# Altium PCB main_board.PcbDoc (part 1 of 2)
Units mm, origin at the board's own origin, x right, y up, seen from the top; angles counter-clockwise.
Board outline 50 x 49.98 mm, 2 copper layers (Top Layer, Bottom Layer), stack 1.071 mm thick; 96 components, 82 nets, 418 pads, 272 vias.
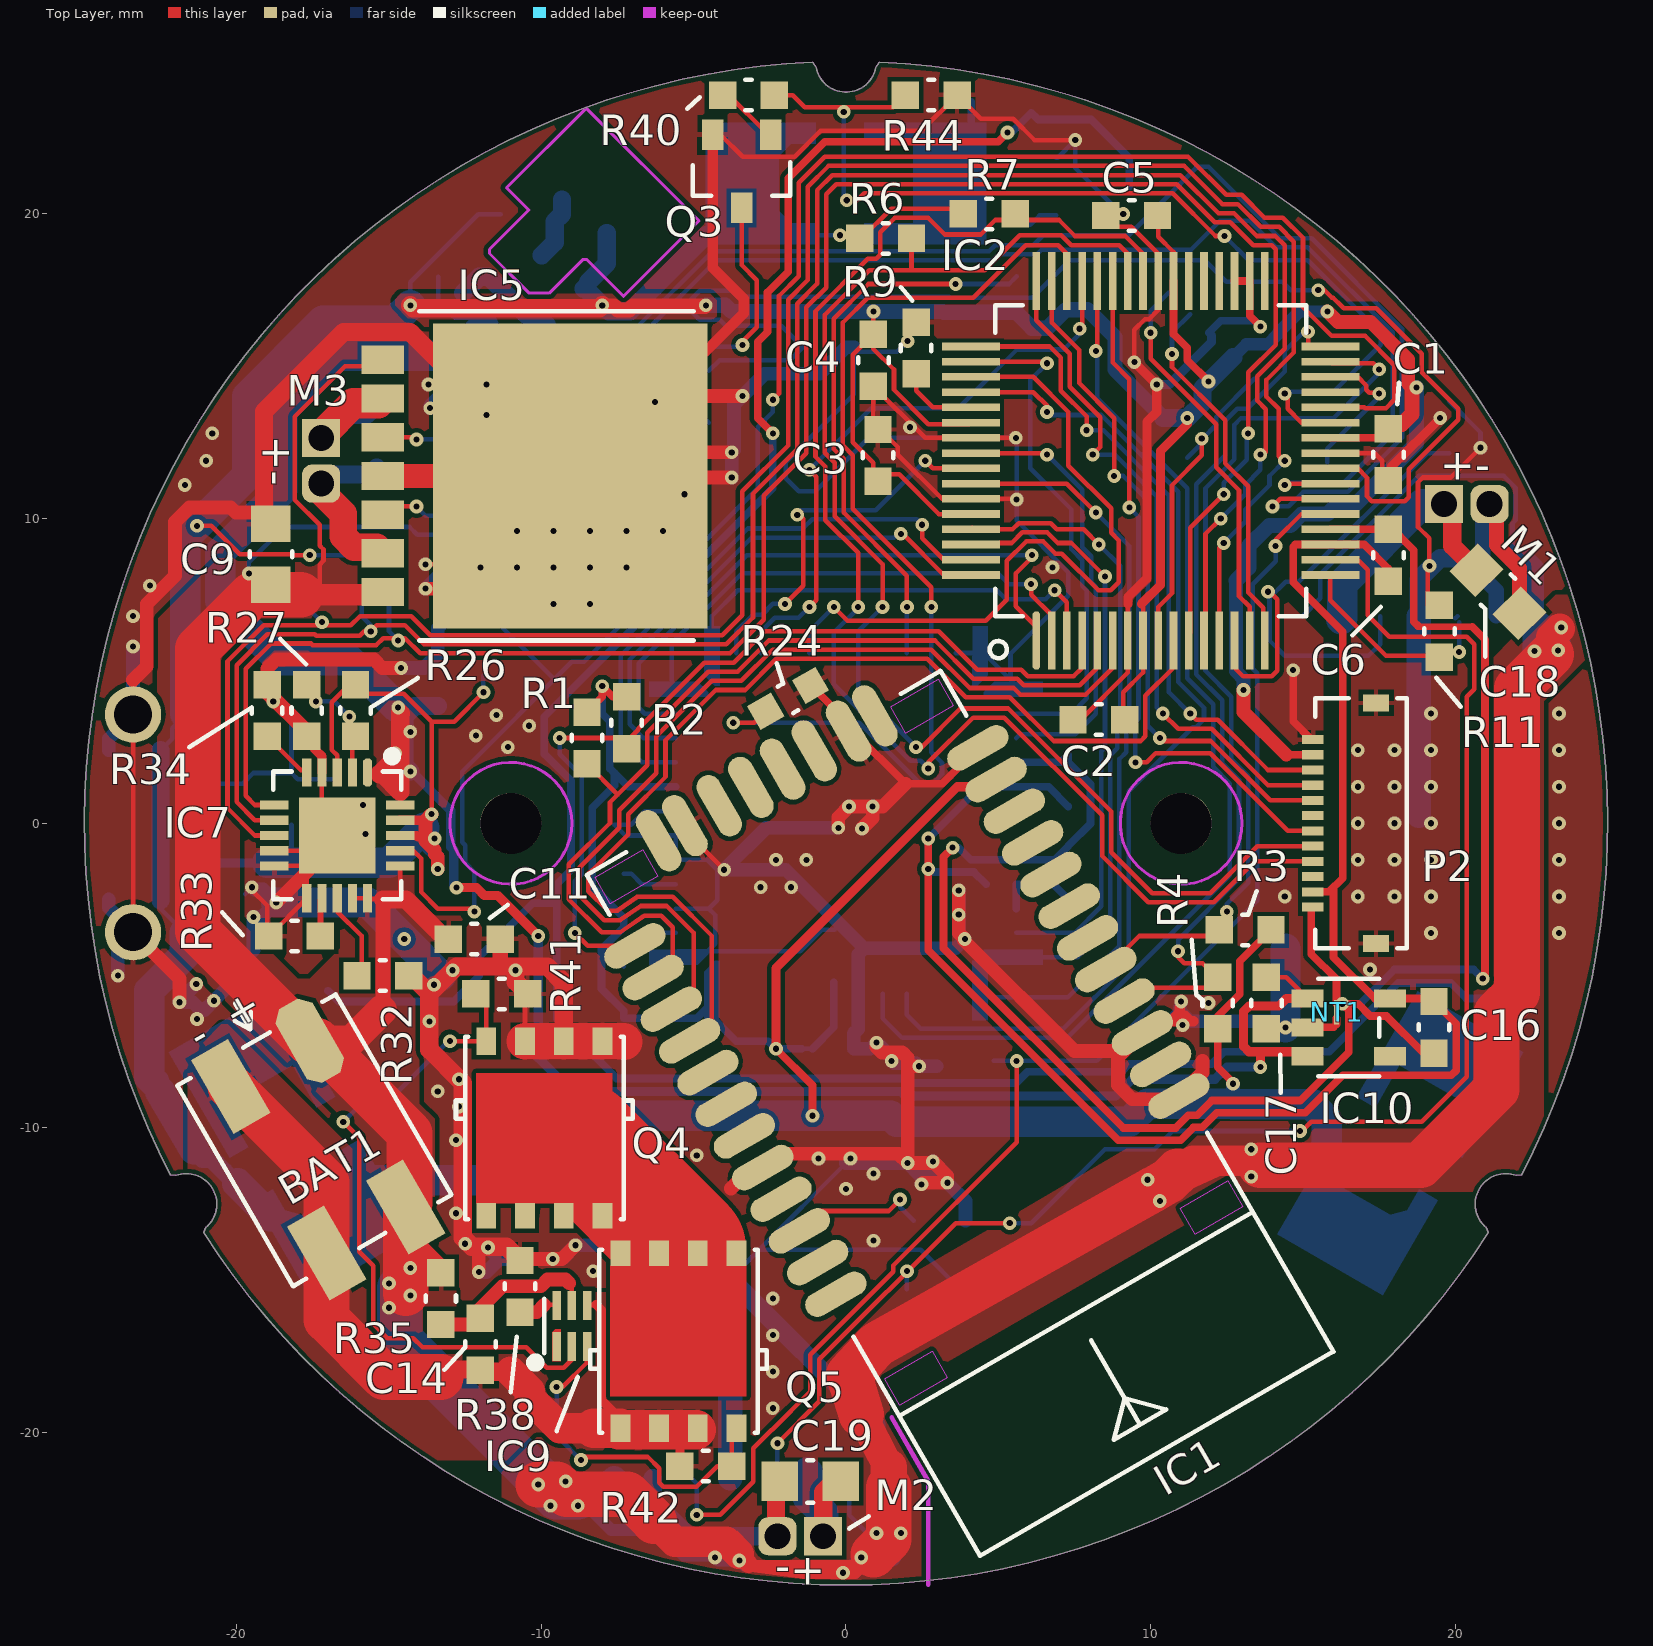
[diagram p0: Top Layer view]
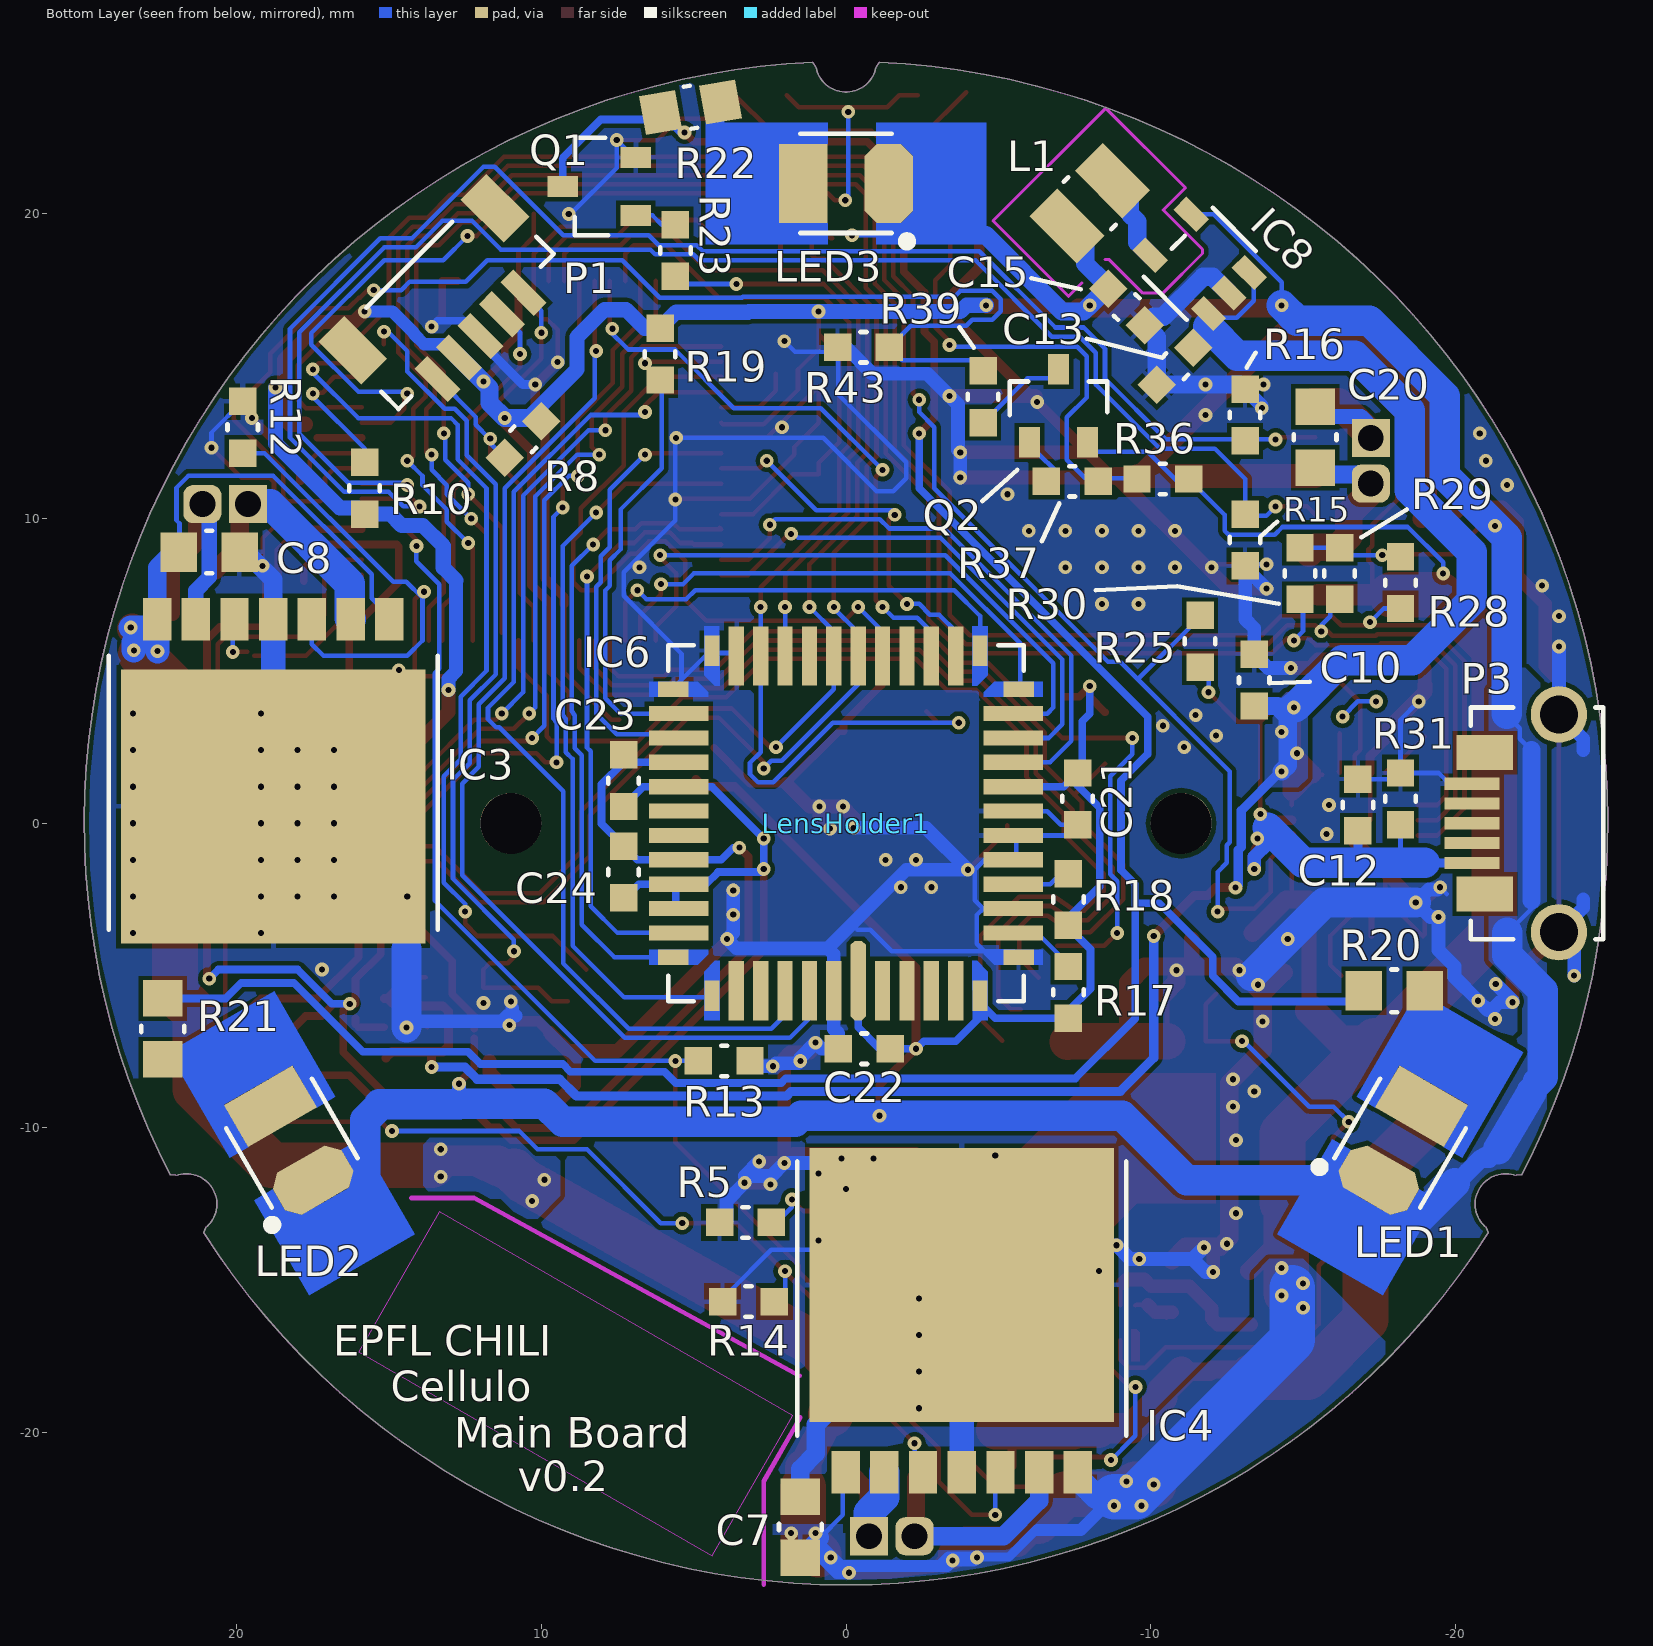
[diagram p1: Bottom Layer view, seen from below]

## Layer stack, top to bottom
Top Layer: signal copper 0.0356
Dielectric: core 1, FR-4, Dk 4.8
Bottom Layer: signal copper 0.0356

## Board outline
-21.085,-13.432 -21.008,-13.266 ccw(c-21.651,-12.5) -21.993,-11.56 -22.175,-11.544 cw(c0,0) -1.09,24.976 -0.985,24.826 ccw(c0,25) 0.985,24.826 1.09,24.976 cw(c0,0) 22.175,-11.544 21.993,-11.56 ccw(c21.651,-12.5) 21.008,-13.266 21.085,-13.432 cw(c0,0)

## Design rules (kind name [scope] priority, off if disabled: settings)
Clearance [All] p1: gap=0.15
ComponentClearance "NT1 clearance" [InComponent('NT1')] p1: gap=0 collisioncheckmode=3 verticalgap=0 showdistances=FALSE
ComponentClearance [All] p2: gap=0.15 collisioncheckmode=3 verticalgap=0.254 showdistances=FALSE
Height [All] p1: minheight=0 maxheight=999 prefheight=1
HoleSize [All] p1: absolutevalues=TRUE maxlimit=999 minlimit=0.2 maxpercent=80.000 minpercent=20.000
HoleToHoleClearance [All] p1: gap=0.45 allowstackedmicrovias=TRUE
MinimumSolderMaskSliver [All] p1: minsoldermaskwidth=0.1
PlaneClearance [All] p1: clearance=0.15
PlaneConnect [All] p1: planeconnectstyle=Relief reliefexpansion=0.45 reliefentries=4 reliefconductorwidth=0.15 reliefairgap=0.15
PolygonConnect ViaConnect [All vs IsVia] p1: connectstyle=Direct reliefconductorwidth=0.15 reliefentries=4 polygonreliefangle="90 Angle" airgapwidth=0.15
PolygonConnect [All] p2: connectstyle=Relief reliefconductorwidth=0.15 reliefentries=4 polygonreliefangle="90 Angle" airgapwidth=0.15
RoutingVias [All] p1: holewidth=0.3 width=0.45 viastyle="Through Hole" minholewidth=0.3 minwidth=0.45 maxholewidth=999 maxwidth=999
ShortCircuit NC1_ALLOW [InComponent('IC9')] p1: allowed=TRUE
ShortCircuit [All] p2: allowed=FALSE
SilkToSilkClearance [All] p1: silktosilkclearance=0
SilkToSolderMaskClearance [IsPad] p1: minsilkscreentomaskgap=0.15 clearancetoexposedcopper=TRUE
SolderMaskExpansion [All] p1: expansion=0.102
Width [All] p1: maxlimit=999 minlimit=0.15 preferedwidth=0.15 minimp=50.000000 maximp=50.000000 favimp=50.000000
18 further rules are at their usual default settings.

## Classes and differential pairs
component class Communication: IC1 R1 R2 R3 R4 R5
component class Microcontroller: C1 C2 C3 C4 C5 C6 IC2 P1 P2 R6 R7 R8 R9 R10
component class Motor: C7 C8 C9 C18 C19 C20 IC3 IC4 IC5 M1 M2 M3 R11 R12 R13 R14 R15 R16
component class Optics: C21 C22 C23 C24 IC6 LED1 LED2 LED3 Q1 R17 R18 R19 R20 R21 R22 R23 R24
component class Power: BAT1 C10 C11 C12 C13 C14 C15 C16 C17 IC7 IC8 IC9 IC10 L1 NT1 P3 Q2 Q3 Q4 Q5 R25 R26 R27 R28 R29 R30 R31 R32 R33 R34 R35 R36 R37 R38 R39 R40 R41 R42 R43 R44
net class PIXEL_D[0..7]: PIXEL_D0 PIXEL_D1 PIXEL_D2 PIXEL_D3 PIXEL_D4 PIXEL_D5 PIXEL_D6 PIXEL_D7

## Components (designator, comment, footprint, x,y, rotation, side; value= is the part's Value field where it differs from the comment)
BAT1 "Battery_1S" "WAGO 2059-302" -17.45,-10.404 r300 top
C1 "0.1uF" 1608[0603]_M 17.8,12.1 r90 top
C2 "0.1uF" 1608[0603]_M 8.3,3.4 r0 top
C3 "0.1uF" 1608[0603]_M 1.05,12.075 r270 top
C4 "0.1uF" 1608[0603]_M 0.9,15.2 r90 top
C5 "0.1uF" 1608[0603]_M 9.375,19.95 r0 top
C6 "0.1uF" 1608[0603]_M 17.8,8.8 r270 top
C7 "47uF" 2012[0805]_M 1.5,-23.1 r270 bottom
C8 "47uF" 2012[0805]_M 20.9,8.9 r0 bottom
C9 "47uF" 2012[0805]_M -18.875,8.825 r270 top
C10 "4.7uF, 10V" 1608[0603]_M -13.4,4.7 r270 bottom
C11 "4.7uF, 10V" 1608[0603]_M -12.2,-3.8 r180 top
C12 "10uF, 10V" 1608[0603]_M -16.8,0.6 r270 bottom
C13 "4.7uF, 10V" 1608[0603]_M -10.8,15 r135 bottom
C14 "0.1uF, 10V" 1608[0603]_M -12,-17.1 r90 top
C15 "10uF, 10V" 1608[0603]_M -9.21,16.944 r45 bottom
C16 "4.7uF, 10V" 1608[0603]_M 19.3,-6.7 r90 top
C17 "4.7uF, 10V" 1608[0603]_M 13.8,-5.9 r90 top
C18 "Unpopulated" 2012[0805]_M 21.4,7.6 r135 top
C19 "Unpopulated" 2012[0805]_M -1.175,-21.6 r0 top
C20 "Unpopulated" 2012[0805]_M -15.4,12.67 r90 bottom
C21 "0.1uF" 1608[0603]_M -7.6,0.8 r90 bottom
C22 "0.1uF" 1608[0603]_M -0.6,-7.4 r180 bottom
C23 "0.1uF" 1608[0603]_M 7.3,1.4 r270 bottom
C24 "0.1uF" 1608[0603]_M 7.3,-1.6 r270 bottom
IC1 "RN42-I/RM" RN42 3.748,-9.522 r210 top
IC2 "PIC32MZ1024ECG064-I/PT" TQFP-64_M 10,11.9 r90 top
IC3 "BD6210HFP" HRP7_N 18.8,0.8 r0 bottom
IC4 "BD6210HFP" HRP7_N -3.8,-15.4 r180 bottom
IC5 "BD6210HFP" HRP7_N -9.3,11.4 r270 top
IC6 "MT9V034C12STM" CLCC-48_m 0,0 r0 bottom
IC7 "MCP73871-2CCI/ML" QFN-20_M -16.7,-0.4 r90 top
IC8 "LM3671MF-3.3" SOT23-5_N -11.614,18.359 r45 bottom
IC9 "BQ29700DSET" WSON-6_M -9,-16.5 r0 top
IC10 "LP2980-AIM5-3.3" SOT23-5_N 16.5,-6.7 r0 top
L1 "SRN2512-2R2M" 2520[1008]_N -8,20.35 r315 bottom
LED1 "Unpopulated" PLCC2_WITH_HEATSINK -18.19,-10.5 r300 bottom
LED2 "Unpopulated" PLCC2_WITH_HEATSINK 18.19,-10.5 r240 bottom
LED3 "Unpopulated" PLCC2_WITH_HEATSINK 0,21 r180 bottom
LensHolder1 "Unpopulated" BoardLensMount_M12_22mm 0,0 r180 bottom
M1 "Unpopulated" CABLE-TERMINAL1x2 20.375,10.475 r0 top
M2 "Unpopulated" CABLE-TERMINAL1x2 -1.5,-23.4 r180 top
M3 "Unpopulated" CABLE-TERMINAL1x2 -17.225,11.9 r270 top
NT1 "NET-TIE" NET-TIE-0.15MM 16.1,-6.2 r90 top net-tie
P1 "Connector 5" BM05B-SRSS_N 13.255,17.255 r135 bottom
P2 "Connector 12" FH33-12S-0.5SH_N 16,0 r90 top
P3 "MicroUSB2.0" USB3076_M -23.375,0 r90 bottom
Q1 "BSS138BK" SOT23-3_N 8.1,20.9 r0 bottom
Q2 "Unpopulated" SOT23-3_N -6.975,13.7 r90 bottom
Q3 "Unpopulated" SOT23-3_N -3.425,21.4 r270 top
Q4 "CSD17527Q5A" PG-TDSON-8_MOSFET_M -9.9,-10 r90 top
Q5 "CSD17527Q5A" PG-TDSON-8_MOSFET_M -5.5,-17 r270 top
R1 "10K" 1608[0603]_M -8.5,2.8 r90 top
R2 "10K" 1608[0603]_M -7.2,3.3 r90 top
R3 "10K" 1608[0603]_M 13.1,-3.5 r0 top
R4 "10K" 1608[0603]_M 12.2,-5.9 r270 top
R5 "10K" 1608[0603]_M 3.3,-13.1 r180 bottom
R6 "1K5" 1608[0603]_M 1.3,19.2 r180 top
R7 "1K5" 1608[0603]_M 4.7,20 r180 top
R8 "10K" 1608[0603]_M 10.6,12.6 r135 bottom
R9 "Unpopulated" 1608[0603]_M 2.3,15.6 r270 top
R10 "10K" 1608[0603]_M 15.8,11 r270 bottom
R11 "10K" 1608[0603]_M 19.475,6.3 r270 top
R12 "10K" 1608[0603]_M 19.8,13 r270 bottom
R13 "10K" 1608[0603]_M 4,-7.8 r0 bottom
R14 "10K" 1608[0603]_M 3.2,-15.7 r180 bottom
R15 "10K" 1608[0603]_M -13.1,9.3 r90 bottom
R16 "10K" 1608[0603]_M -13.1,13.4 r270 bottom
R17 "1K" 1608[0603]_M -7.3,-5.55 r270 bottom
R18 "1K" 1608[0603]_M -7.3,-2.5 r270 bottom
R19 "10K" 1608[0603]_M 6.1,15.4 r90 bottom
R20 "26R1, 0.1%, 1/8W" 2012[0805]_M -18,-5.5 r180 bottom
R21 "26R1, 0.1%, 1/8W" 2012[0805]_M 22.425,-6.75 r270 bottom
R22 "26R1, 0.1%, 1/8W" 2012[0805]_M 5.1,23.5 r170 bottom
R23 "330" 1608[0603]_M 5.6,18.8 r90 bottom
R24 "10K" 1608[0603]_M -1.9,4.1 r210 top
R25 "100K" 1608[0603]_M -11.625,5.975 r270 bottom
R26 "270K" 1608[0603]_M -16.1,3.7 r90 top
R27 "100K" 1608[0603]_M -17.7,3.7 r90 top
R28 "10K" 1608[0603]_M -18.2,7.9 r90 bottom
R29 "10K" 1608[0603]_M -16.2,8.2 r90 bottom
R30 "10K" 1608[0603]_M -14.9,8.2 r90 bottom
R31 "100K" 1608[0603]_M -18.2,0.8 r270 bottom
R32 "1K69" 1608[0603]_M -15.2,-5 r180 top
R33 "16K9" 1608[0603]_M -18.1,-3.7 r0 top
R34 "10K" 1608[0603]_M -19,3.7 r270 top
R35 "330" 1608[0603]_M -13.3,-15.6 r90 top
R36 "Unpopulated" 1608[0603]_M -10.4,11.3 r180 bottom
R37 "Unpopulated" 1608[0603]_M -7.425,11.225 r180 bottom
R38 "2K2" 1608[0603]_M -10.7,-15.2 r270 top
R39 "Unpopulated" 1608[0603]_M -4.5,14 r270 bottom
R40 "Unpopulated" 1608[0603]_M -3.2,23.9 r0 top
R41 "5M1" 1608[0603]_M -11.3,-5.6 r180 top
R42 "5M1" 1608[0603]_M -4.6,-21.1 r0 top
R43 "10K" 1608[0603]_M -0.575,15.625 r180 bottom
R44 "Unpopulated" 1608[0603]_M 2.8,23.9 r180 top

## Footprints (in the part's own frame and the unit in brackets; to place one, negate y for a bottom-side part, rotate by r counter-clockwise, add the part's x,y. Pads: shape width x height; smd on the part's side, far side on the other; paste and mask are expansions set on the pad)
1608[0603]_M [mm] "Two Terminal Package, Body 1.6x0.8mm, IPC Low Density"
  rect 0.9x0.9 smd: 1(-0.85,0) 2(0.85,0)
  silkscreen extent -0.1,-0.5 0.1,0.5, body extent -0.8,-0.4 0.8,0.4, height 0.85
2012[0805]_M [mm] "Two Terminal Package, Body 2x1.2mm, IPC Low Density"
  rect 1.2x1.3 smd: 1(-1,0) 2(1,0)
  silkscreen extent -0.1,-0.7 0.1,0.7, body extent -1,-0.6 1,0.6, height 1.3
2520[1008]_N [mm] "Two Terminal Package, Body 2.5x2mm, IPC Medium Density"
  rect 1.3x2.2 smd: 1(-1.05,0) 2(1.05,0)
  silkscreen extent -0.1,-1.1 0.1,1.1, body extent -1.25,-1 1.25,1, height 1.2
BM05B-SRSS_N [mm] "SH Connector, 5-Leads, 1mm Pitch, Top Entry, IPC Medium Density"
  rect 0.6x1.55 smd: 1(-2,-1.775) 2(-1,-1.775) 3(0,-1.775) 4(1,-1.775) 5(2,-1.775)
  rect 1.2x2 smd: Mechanical1(-3.3,0.85) Mechanical2(3.3,0.85)
  silkscreen extent -3.6,-1.58 3.6,1.53, body extent -3.5,-1.45 3.5,1.45, height 4.25
BoardLensMount_M12_22mm [mm] "M12 (S-Mount) board lens mount base, 22mm hole distance, 16mm height"
  round 2 hole 2 unplated: 0(-11,0) 1(11,0)
  body extent -13.25,-10.5 13.25,10.5, height 16
CABLE-TERMINAL1x2 [mm] "Cable to board terminal, 1x2, 1.5mm pitch"
  rect 1.25x1.25 hole 0.85 mask+0.075: 1(-0.75,0)
  rrect50% 1.25x1.25 hole 0.85 mask+0.075: 2(0.75,0)
CLCC-48_m [mm] "CLCC, 48-Leads, Body 11.43x11.43x2.3mm, Pitch 0.8mm, IPC Low Density"
  oct 0.5x2.6 smd paste-0.025 mask+0.075: 1(-0.4,5.165)
  rect 0.5x1.95 smd paste-0.025 mask+0.075: 2(-1.2,5.49) 3(-2,5.49) 4(-2.8,5.49) 5(-3.6,5.49) 20(-3.6,-5.49) 21(-2.8,-5.49) 22(-2,-5.49) 23(-1.2,-5.49) 24(-0.4,-5.49) 25(0.4,-5.49) 26(1.2,-5.49) 27(2,-5.49) 28(2.8,-5.49) 29(3.6,-5.49) 44(3.6,5.49) 45(2.8,5.49) 46(2,5.49) 47(1.2,5.49) 48(0.4,5.49)
  rect 0.5x1 smd paste-0.025 mask+0.075: 6(-4.4,5.665) 19(-4.4,-5.665) 30(4.4,-5.665) 43(4.4,5.665)
  rect 1x0.5 smd paste-0.025 mask+0.075: 7(-5.665,4.4) 18(-5.665,-4.4) 31(5.665,-4.4) 42(5.665,4.4)
  rect 1.95x0.5 smd paste-0.025 mask+0.075: 8(-5.49,3.6) 9(-5.49,2.8) 10(-5.49,2) 11(-5.49,1.2) 12(-5.49,0.4) 13(-5.49,-0.4) 14(-5.49,-1.2) 15(-5.49,-2) 16(-5.49,-2.8) 17(-5.49,-3.6) 32(5.49,-3.6) 33(5.49,-2.8) 34(5.49,-2) 35(5.49,-1.2) 36(5.49,-0.4) 37(5.49,0.4) 38(5.49,1.2) 39(5.49,2) 40(5.49,2.8) 41(5.49,3.6)
  Top Layer region: -6.465,4.15 -4.515,4.15 -4.515,4.3 -4.865,4.65 -6.465,4.65
  Top Layer region: -4.155,6.465 -4.15,4.515 -4.3,4.515 -4.65,4.865 -4.65,6.465
  Top Layer region: -6.465,-4.155 -4.515,-4.15 -4.515,-4.3 -4.865,-4.65 -6.465,-4.65
  Top Layer region: -4.15,-6.465 -4.15,-4.515 -4.3,-4.515 -4.65,-4.865 -4.65,-6.465
  Top Layer region: 4.155,-6.465 4.15,-4.515 4.3,-4.515 4.65,-4.865 4.65,-6.465
  Top Layer region: 6.465,-4.15 4.515,-4.15 4.515,-4.3 4.865,-4.65 6.465,-4.65
  Top Layer region: 6.465,4.155 4.515,4.15 4.515,4.3 4.865,4.65 6.465,4.65
  Top Layer region: 4.15,6.465 4.15,4.515 4.3,4.515 4.65,4.865 4.65,6.465
  silkscreen extent -5.84,-5.84 5.84,5.84, body extent -5.71,-5.71 5.71,5.71, height 2.3
FH33-12S-0.5SH_N [mm] "Flax flexible cable connector, 12-Leads, 0.5mm Pitch, Side entry, IPC medium density"
  rect 0.3x0.7 smd paste-0.025 mask+0.049: 1(-2.75,0.675) 2(-2.25,0.675) 3(-1.75,0.675) 4(-1.25,0.675) 5(-0.75,0.675) 6(-0.25,0.675) 7(0.25,0.675) 8(0.75,0.675) 9(1.25,0.675) 10(1.75,0.675) 11(2.25,0.675) 12(2.75,0.675)
  rect 0.55x0.85 smd: Mechanical1(-3.95,-1.4) Mechanical2(3.95,-1.4)
  silkscreen extent -4.1,-2.4 4.1,0.6, body extent -4.08,-2.35 4.07,0.5, height 1.3
HRP7_N [mm] "HRP, 7-Leads, 1.27mm Pitch, Body 9x9.8mm, Lead Span 10.7mm, IPC Medium Density"
  rect 0.93x1.4 smd: 1(-3.81,-5.9) 2(-2.54,-5.9) 3(-1.27,-5.9) 4(0,-5.9) 5(1.27,-5.9) 6(2.54,-5.9) 7(3.81,-5.9)
  rect 10x9 smd: Heatsink(0,0.25)
  silkscreen extent -5.4,-4.7 5.4,4.3, body extent -4.88,-4.7 4.88,4.3, height 2
NET-TIE-0.15MM [mm] "Net tie, 0.15mm track width"
  rect 0.4x0.15 smd paste-0.075 mask+0: 1(-0.2,0) 2(0.2,0)
PG-TDSON-8_MOSFET_M [mm] "PG-TDSON, MOSFET terminals, 8-Leads, Body 5x5.8mm, Pitch 1.27mm, IPC Low Density"
  rect 0.83x0.65 smd: D(-2.885,-1.905) D(-2.885,-0.635) D(-2.885,0.635) D(-2.885,1.905)
  rect 0.9x0.65 smd: G(2.85,1.905) S(2.85,-1.905) S(2.85,-0.635) S(2.85,0.635)
  Top Layer region: 1.798,2.23 -2.472,2.23 -2.472,-2.23 1.798,-2.23
  silkscreen extent -3,-2.9 3,2.9, body extent -2.9,-2.5 2.9,2.5, height 1.1
PLCC2_WITH_HEATSINK [mm] "PLCC, 2-Leads, Body 3x2.8mm, Lead Span 3.5mm, with heatsink pad extensions"
  oct 1.6x2.6 smd: 1(1.4,0)
  rect 1.6x2.6 smd: 2(-1.4,0)
  Top Layer region: 4.6,2 4.6,-2 1,-2 1,-1.3 1.8,-1.3 2.2,-0.9 2.2,0.9 1.8,1.3 1,1.3 1,2
  Top Layer region: -4.6,-2 -4.6,2 -0.6,2 -0.6,1.3 -2.2,1.3 -2.2,-1.3 -0.6,-1.3 -0.6,-2
  silkscreen extent -1.5,-2.05 2.15,1.62, body extent -1.6,-1.4 1.6,1.4, height 1.85
QFN-20_M [mm] "QFN, 20-Leads, Body 4x4mm, Pitch 0.5mm, IPC Low Density"
  oct 0.93x0.3 smd paste-0.025 mask+0.05: 1(2.065,-1)
  rect 0.93x0.3 smd paste-0.025 mask+0.05: 2(2.065,-0.5) 3(2.065,0) 4(2.065,0.5) 5(2.065,1) 11(-2.065,1) 12(-2.065,0.5) 13(-2.065,0) 14(-2.065,-0.5) 15(-2.065,-1)
  rect 0.3x0.93 smd paste-0.025 mask+0.05: 6(1,2.065) 7(0.5,2.065) 8(0,2.065) 9(-0.5,2.065) 10(-1,2.065) 16(-1,-2.065) 17(-0.5,-2.065) 18(0,-2.065) 19(0.5,-2.065) 20(1,-2.065)
  rect 2.5x2.5 smd mask+0.05: EP(0,0)
  silkscreen extent -2.1,-2.1 2.75,2.1, body extent -2,-2 2,2, height 1
RN42 [mm] "Microchip RN42 Bluetooth Module"
  oval 2.2x0.8 smd: 1(-6.5,3.1) 2(-6.5,1.9) 3(-6.5,0.7) 4(-6.5,-0.5) 5(-6.5,-1.7) 6(-6.5,-2.9) 7(-6.5,-4.1) 8(-6.5,-5.3) 9(-6.5,-6.5) 10(-6.5,-7.7) 11(-6.5,-8.9) 12(-6.5,-10.1) 13(6.5,-10.1) 14(6.5,-8.9) 15(6.5,-7.7) 16(6.5,-6.5) 17(6.5,-5.3) 18(6.5,-4.1) 19(6.5,-2.9) 20(6.5,-1.7) 21(6.5,-0.5) 22(6.5,0.7) 23(6.5,1.9) 24(6.5,3.1)
  oval 0.8x2.2 smd mask+0.05: 28(3.1,-12.7) 29(-3.1,-12.7) 30(4.1,-12.7) 35(-4.1,-12.7)
  oval 0.8x2.2 smd: 31(1.8,-12.7) 32(0.6,-12.7) 33(-0.6,-12.7) 34(-1.8,-12.7)
  Top Layer keep-out region: 4.7,6.3 4.7,7.3 6.5,7.3 6.5,6.3
  Top Layer keep-out region: -6.5,6.3 -6.5,7.3 -4.7,7.3 -4.7,6.3
  Top Layer keep-out region: 4.7,-12.7 4.7,-11.7 6.5,-11.7 6.5,-12.7
  Top Layer keep-out region: -6.5,-12.7 -6.5,-11.7 -4.7,-11.7 -4.7,-12.7
  Keep-Out Layer region: -6.7,12.9 6.7,12.9 6.7,7.6 -6.7,7.6
  silkscreen extent -6.7,-12.9 6.7,12.9, body extent -6.7,-12.9 6.7,12.9, height 2.4
SOT23-3_N [mm] "SOT23, 3-Leads, Body 1.4x3mm, Lead Span 2.6mm, IPC Medium Density"
  rect 1x0.7 smd: 1(-1.2,0.95) 2(-1.2,-0.95) 3(1.2,0)
  silkscreen extent -0.3,-1.6 0.8,1.6, body extent -0.7,-1.5 0.7,1.5, height 1.1
SOT23-5_N [mm] "SOT23, 5-Leads, Body 1.6x3mm, Lead Span 3mm, IPC Medium Density"
  rect 1.05x0.6 smd: 1(-1.35,0.95) 2(-1.35,0) 3(-1.35,-0.95) 4(1.35,-0.95) 5(1.35,0.95)
  silkscreen extent -1,-1.6 1,1.6, body extent -0.9,-1.5 0.9,1.5, height 1.45
TQFP-64_M [mm] "TQFP, 44-Leads, Body 10x10x1.2mm, Pitch 0.5mm, Lead Span 12mm, IPC Low Density"
  oct 1.9x0.25 smd paste-0.025 mask+0.075: 1(-5.9,3.75)
  rect 1.9x0.25 smd paste-0.025 mask+0.075: 2(-5.9,3.25) 3(-5.9,2.75) 4(-5.9,2.25) 5(-5.9,1.75) 6(-5.9,1.25) 7(-5.9,0.75) 8(-5.9,0.25) 9(-5.9,-0.25) 10(-5.9,-0.75) 11(-5.9,-1.25) 12(-5.9,-1.75) 13(-5.9,-2.25) 14(-5.9,-2.75) 15(-5.9,-3.25) 16(-5.9,-3.75) 33(5.9,-3.75) 34(5.9,-3.25) 35(5.9,-2.75) 36(5.9,-2.25) 37(5.9,-1.75) 38(5.9,-1.25) 39(5.9,-0.75) 40(5.9,-0.25) 41(5.9,0.25) 42(5.9,0.75) 43(5.9,1.25) 44(5.9,1.75) 45(5.9,2.25) 46(5.9,2.75) 47(5.9,3.25) 48(5.9,3.75)
  rect 0.25x1.9 smd paste-0.025 mask+0.075: 17(-3.75,-5.9) 18(-3.25,-5.9) 19(-2.75,-5.9) 20(-2.25,-5.9) 21(-1.75,-5.9) 22(-1.25,-5.9) 23(-0.75,-5.9) 24(-0.25,-5.9) 25(0.25,-5.9) 26(0.75,-5.9) 27(1.25,-5.9) 28(1.75,-5.9) 29(2.25,-5.9) 30(2.75,-5.9) 31(3.25,-5.9) 32(3.75,-5.9) 49(3.75,5.9) 50(3.25,5.9) 51(2.75,5.9) 52(2.25,5.9) 53(1.75,5.9) 54(1.25,5.9) 55(0.75,5.9) 56(0.25,5.9) 57(-0.25,5.9) 58(-0.75,5.9) 59(-1.25,5.9) 60(-1.75,5.9) 61(-2.25,5.9) 62(-2.75,5.9) 63(-3.25,5.9) 64(-3.75,5.9)
  silkscreen extent -6.48,-5.1 5.1,5.28, body extent -5,-5 5,5, height 1.2
USB3076_M [mm] "Micro USB B Receptacle, Horizontal, 0.65mm Pitch, IPC Low Density"
  rect 0.4x1.8 smd paste-0.025 mask+0.074: 1(-1.3,2.825) 2(-0.65,2.825) 3(0,2.825) 4(0.65,2.825) 5(1.3,2.825)
  round 1.85 hole 1.25: PegSlot1(-3.575,-0.025) PegSlot2(3.575,-0.025)
  rect 1.15x1.85 smd paste-0.025 mask+0.05: Shield1(-2.32,2.405) Shield2(2.32,2.405)
  silkscreen extent -3.8,-1.48 3.8,2.87, body extent -3.7,-2.77 3.7,2.78, height 2.66
"WAGO 2059-302" [mm] "Wire to Board Terminal, 2-Poles, 3mm Pitch"
  oct 2.8x1.4 smd: 1(-2.9,1.5)
  rect 2.8x1.4 smd: 1(3.4,1.5) 2(-2.9,-1.5) 2(3.4,-1.5)
  silkscreen extent -5.2,-3 3.8,3, body extent -3.7,-2.95 3.7,2.95, height 2.7
WSON-6_M [mm] "WSON, 6-Leads, Body 1.55x1.55mm, Pitch 0.5mm, IPC Low Density"
  rect 0.28x0.95 smd paste-0.025 mask+0.05: 1(-0.5,-0.675) 2(0,-0.675) 3(0.5,-0.675) 4(0.5,0.675) 5(0,0.675) 6(-0.5,0.675)
  Top Layer region: -0.64,-0.2 -0.54,-0.1 -0.36,-0.1 -0.36,-1.15 -0.64,-1.15
  silkscreen extent -1.35,-1.35 0.9,0.9, body extent -0.77,-0.77 0.77,0.77, height 0.8

## Part data
BAT1: "Generic single cell battery"
C1 C2 C3 C4 C5 C6 C7 C8 C9 C10 C11 C12 C13 C14 C15 C16 C17 C18 C19 C20 C21 C22 C23 C24: library part Capacitor, "Generic Capacitor"
IC1: library part RN42, "Bluetooth 2.1 module"
IC2: library part PIC32MZ1024ECG064, "32-bit Microcontroller"
IC3 IC4 IC5: library part BD621xHFP, "DC Motor driver, full H-bridge"
IC6: "1/3\" WVGA CMOS Image Sensor"
IC7: "Li-Po battery charge controller with system load sharing"
IC8: library part LM3671, "2MHz, 600mA step-down converter"
IC9: library part BQ29700, "Li-Po battery voltage and current protection"
IC10: library part LP2980-N, "50 mA, ultra low drop-out voltage regulator"
L1: library part Inductor, "Inductor"
LED1 LED2 LED3: library part LED, "Generic LED"
M1 M2 M3: library part DCMotor, "Generic DC motor"
NT1: "Generic net tie"
P1: "Connector 5-Pin"
P2: "Connector 12-Pin"
P3: "Micro USB 2.0 plug/receptacle, 5-Leads"
Q1 Q3 Q4 Q5: library part MOSFET-N_BodyDiode, "N-channel MOSFET with body diode drawn"
Q2: library part MOSFET-P_BodyDiode, "P-channel MOSFET with body diode drawn"
R1 R2 R3 R4 R5 R6 R7 R8 R9 R10 R11 R12 R13 R14 R15 R16 R17 R18 R19 R20 R21 R22 R23 R24 R25 R26 R27 R28 R29 R30 R31 R32 R33 R34 R35 R36 R37 R38 R39 R40 R41 R42 R43 R44: library part Resistor, "Generic Resistor"

## Via types
v1: diameter 0.45, hole 0.2, Top Layer to Bottom Layer, 271 vias
v2: diameter 0.45, hole 0.2, Top Layer to Bottom Layer, tented both sides, 1 vias

## Nets (pads, with @x,y where several pads share a name; then routed paths per layer and width w, separated by ;. In a path a pad name is that pad's centre, name@x,y a point inside that pad or via, vN(x,y) a via of type N, cw(c..) or ccw(c..) an arc to the next point about the centre after c; other vN are vias at no path point)
3V3: C1.2 C2.2 C3.2 C4.2 C5.2 C15.2 C21.2 C22.2 IC1.11 IC2.8 IC2.26 IC2.39 IC2.54 IC2.60 IC6.1 IC6.6 IC6.14 IC8.4 L1.2 LED1.1 LED2.1 LED3.1 P1.2 P2.11 R1.2 R2.2 R3.2 R4.2 R6.2 R7.2 R8.2 R10.2 R17.2 R18.2 R19.2 R28.2 R29.2 R30.2 | length 239
  Top Layer w0.15: v1(-21.3,9.764) -20.839,9.764 -19.9,8.825 -18.157,8.825 -18.132,8.8 v1(-17.6,8.8) ; R6.2@0.45,19.2 0.508,19.2 1.483,20.175 3.675,20.175 R7.2@3.85,20 ; v1(0.9,16.8) C4.2@0.9,16.05 ; IC2.60@4.1,10.15 3.05,10.15 1.75,11.45 0.9,11.45 0.9,11.833 0.225,12.508 0.225,15.375 C4.2@0.9,16.05 ; IC2.54@4.1,13.15 4.05,13.1 2.7,13.1 1.575,14.225 1.575,14.893 0.9,15.568 C4.2@0.9,16.05 ; C2.2@9.15,3.4 9.1,3.45 9.1,4.3 9.75,4.95 9.75,7.15 9.7,7.2 ; C5.2@10.25,20 10.25,19.25 10.75,18.75 IC2.39@10.75,17.8
  Top Layer w0.25: R1.2@-8.5,3.65 -8,4.15 v1(-8,4.5) -7.65,4.15 R2.2@-7.2,4.15 ; v1(-8,17) v1@-7.974,16.974 ; v1(-2.3,-7.4) -1.1,-8.6 v1(-1.1,-9.6) ; IC2.39@10.75,17.8 10.75,16.057 11.2,15.607 11.2,15.2 v1(11.9,14.5) ; R4.2@12.2,-7.05 12.2,-8 12.7,-8.5 v1(12.7,-8.55) ; R4.2@12.2,-6.75 12.2,-6.339 12.925,-5.614 12.925,-4.525 R3.2@13.95,-3.5 ; 14.45,2.25 P2.11@15.275,2.25 ; IC2.26@15.9,12.65 C1.2@17.35,12.65
  Top Layer w0.3: v1(-2.3,-7.4) -2.3,-4.758 3.658,1.2 4.691,1.2 IC1.11@4.927,1.436 ; 9.7,7.2 10.325,7.825 10.325,12.225 11.2,13.1 v1(11.2,13.3)
  Top Layer w0.45: v1(13.05,4.375) 13.05,3.65 14.45,2.25 ; v1(15.8,16.8) 16.15,16.45 17.223,16.45 18.45,15.223 18.45,14.425 v1@18.525,14.35
  Top Layer w0.5: v1@-7.974,16.974 -7.613,16.974 -7.488,16.849 -7.115,16.849 -6.99,16.974 v1@-4.626,16.974 ; C1.2@17.75,13.1 18.247,13.1 18.575,13.428 v1@18.575,14.2
  Top Layer w0.6: v1(-14.3,17) -14.2,16.9 -8.1,16.9 v1(-8,17)
  Bottom Layer w0.15: -22.5,-2.525 -22.5,-2.8 -21.7,-3.6 ; -22.5,2.4 -22.12,2.78 -22.12,3.12 -21.692,3.548 -21.692,3.592 ; v1(-17.6,8.8) -16.45,8.8 R29.2@-16.2,9.05 R30.2@-15,9.05 ; v1(-14.3,17) -14.3,17.759 -12.074,19.985 IC8.4@-11.331,19.985 ; IC6.6@-4.565,-5.55 IC6.6@-4.4,-5.715 ; -1.5,19.3 v1(-0.2,19.3) ; C22.2@-1.45,-7.4 C22.2@-1.1,-7.4
  Bottom Layer w0.25: v1(-8,4.5) -8,3.6 -7.75,3.35 -7.75,1.8 C21.2@-7.6,1.65 ; IC6.14@-5.59,1.2 -7.15,1.2 C21.2@-7.6,1.65 ; IC6.6@-4.4,-5.715 IC6.6@-4.4,-5.9 ; -1.5,-9.6 -1.45,-9.55 ; C22.2@-1.45,-7.4 v1(-2.3,-7.4) -2.55,-7.15 -3.604,-7.15 -4.4,-6.354 IC6.6@-4.4,-5.9 ; C22.2@-1.1,-7.4 -0.4,-6.7 IC6.1@-0.4,-5.215 ; C21.2@-7.6,1.65 -7.6,1.239 -8.325,0.514 -8.325,-2.075 -7.3,-3.1 R18.2@-7.3,-3.35 -7.3,-3.411 -8.025,-4.136 -8.025,-5.425 -7.3,-6.15 R17.2@-7.3,-6.4 -4.9,-6.4 IC6.6@-4.4,-5.9
  Bottom Layer w0.4: P1.2@12.707,15.293 13.139,15.725 13.362,15.725 13.845,15.725 14.182,16.062 14.182,16.095 14.887,16.8 v1(15.8,16.8)
  Bottom Layer w0.45: 12.7,-9.2 v1(12.7,-8.55) ; 12.8,7.972 12.8,4.989 13.05,4.739 v1(13.05,4.375)
  Bottom Layer w0.5: v1(-4.6,17) -3.953,17 -3.753,16.8 v1(0.9,16.8) 3.192,16.8 3.217,16.775 5.575,16.775 R19.2@6.1,16.25 6.616,16.25 7.223,16.857 7.926,16.857 8.825,15.959 8.825,14.891 R8.2@10.416,13.3 ; 12.8,7.972 13.216,8.388 13.216,9.1 13.891,9.775 14.583,9.775 14.958,10.15 R10.2@15.8,10.15 16,10.35 16.614,10.35 18.725,12.461 v1(18.725,14.3)
  Bottom Layer w0.6: -22.5,-2.525 -22.5,2.4 ; -21.4,-10.7 -20.828,-11.011 ; -21.111,-11.011 -20.828,-11.011 ; -19.981,-11.819 -20.019,-11.819 -20.408,-11.43 -20.828,-11.011 ; C15.2@-8.609,17.545 -8.545,17.545 v1(-8,17) -7.799,16.799 -7.094,16.799 -4.593,19.3 -4.2,19.3 -3.4,20.1 ; C15.2@-8.468,17.758 -7.85,18.375 L1.2@-7.85,19.375 ; R8.2@10.416,13.3 v1(11.2,13.3) 11.7,13.8 11.7,14.286 P1.2@12.707,15.293
  Bottom Layer w0.8: -22.7,-8.5 -22.7,-8.629 -22.514,-8.814
  Bottom Layer w1: -22.7,-8.5 -22.872,-8.328 -22.872,-5.497 -21.7,-4.325 -21.7,-3.6 ; -22.514,-8.814 -21.4,-10.7 ; -21.692,3.592 -21.692,9.371 v1(-21.3,9.764) -19.65,11.414 -19.65,14.021 -17.171,16.5 -14.8,16.5 v1(-14.3,17) ; -19.981,-11.819 -18.9,-12.9 ; LED1.1@-17.49,-11.712 -11.182,-11.712 -9.069,-9.6 -1.5,-9.6 1.469,-9.6 1.669,-9.8 9.3,-9.8 9.9,-9.2 12.7,-9.2 ; 12.7,-9.225 15.325,-9.225 15.325,-9.288 15.775,-9.738 15.775,-11.8
A3V3: C6.2 C16.2 C23.2 C24.2 IC2.19 IC6.35 IC6.39 IC6.40 IC10.5 P2.2 | length 61.3
  Top Layer w0.25: v1(2.7,-0.5) 2.7,-4.166 8.934,-10.4 10.985,-10.4 11.406,-9.978 11.692,-9.978 12.17,-9.5 15.08,-9.5 16.305,-8.275 19.864,-8.275 20.025,-8.114 20.025,-6.575 C16.2@19.3,-5.85 19.2,-5.75 IC10.5@17.85,-5.75 17.35,-5.75 16,-4.4 16,-2.1 ; P2.2@15.275,-2.25 15.85,-2.25 16.3,-1.8 16.3,6.286 14.675,7.911 14.675,9.075 14.75,9.15 IC2.19@15.9,9.15 17.011,9.15 17.8,8.361 C6.2@17.8,7.95
  Bottom Layer w0.25: IC6.39@4.6,-2 4.2,-1.6 2.8,-1.6 v1(2.7,-1.5) v1(2.7,-0.5) 4.4,1.2 6.65,1.2 C23.2@7.3,0.55 ; IC6.40@5.59,-2.8 5.59,-2 6.8,-2 C24.2@7.25,-2.45
AGND: C6.1 C16.1 C23.1 C24.1 IC2.20 IC6.34 IC6.38 NT1.2 P2.1 | length 63.3
  Top Layer w0.2: 18.775,6.45 20.55,6.45
  Top Layer w0.25: v1(3.5,-0.8) 3.2,-1.1 3.2,-4.1 9.1,-10 10.819,-10 11.241,-9.578 11.526,-9.578 12.004,-9.1 14.914,-9.1 16.5,-7.514 16.5,-6.136 v1(16.289,-5.925) ; P2.1@15.275,-2.75 15.275,-4.3 16.1,-5.125 16.1,-5.925 v1(16.289,-5.925) ; IC2.20@15.9,9.65 17.6,9.65 17.775,9.825 18.637,8.963 18.637,6.613 18.775,6.475 ; C16.1@19.3,-7.55 18.964,-7.55 17.739,-6.325 17.211,-6.325 16.811,-5.925 v1(16.289,-5.925) ; 20.55,6.45 20.975,6.025 20.975,-5.025 v1(20.9,-5.1)
  Bottom Layer w0.25: v1(3.5,-0.8) 3.7,-0.8 4.1,-1.2 6.85,-1.2 C24.1@7.3,-0.75 7.3,-0.739 8.025,-0.014 8.025,1.275 7.3,2 C23.1@7.3,2.25 7.05,2 IC6.34@5.59,2 ; v1(16.289,-5.925) 16.875,-5.925 18,-4.8 20.6,-4.8 v1(20.9,-5.1)
GND: C1.1 C2.1 C3.1 C4.1 C5.1 C7.1 C8.1 C9.1 C10.1 C11.1 C12.1 C13.1 C15.1 C17.1 C21.1 C22.1 IC1.1 IC1.3 IC1.12 IC1.20 IC1.28 IC1.29 IC2.7 IC2.25 IC2.34 IC2.35 IC2.40 IC2.55 IC2.59 IC3.4 IC3.Heatsink IC4.4 IC4.Heatsink IC5.4 IC5.Heatsink IC6.7 IC6.9 IC6.11 IC6.12 IC6.13 IC6.29 IC6.30 IC6.31 IC6.48 IC7.4 IC7.9 IC7.10 IC7.11 IC7.EP IC8.2 IC10.2 NT1.1 P1.3 P2.12 P2.Mechanical1 P2.Mechanical2 P3.5 P3.PegSlot1 P3.PegSlot2 Q1.2 Q3.2 Q4.S R5.1 R9.1 R11.1 R12.1 R13.1 R14.1 R15.1 R16.1 R24.1 R27.1 R31.1 R32.1 R33.1 R34.1 R38.1 R41.1 R43.1 R44.1 | length 420.8
  Top Layer w0.15: P3.PegSlot1@-23.4,-3.575 P3.PegSlot2@-23.4,3.575 -23.4,4.7 ; v1@-19.5,-2.2 -19,-2.7 -19,-3.65 R33.1@-18.95,-3.7 -18.935,-3.7 IC7.11@-17.7,-2.465 -17.7,-1.6 -17.7,-1.4 IC7.10@-18.765,-1.4 ; IC7.9@-18.765,-0.9 IC7.EP@-17.2,-0.9 ; R27.1@-17.7,2.85 -17.7,3.016 R27.1@-17.7,3.25 ; IC7.EP@-17.2,0.1 IC7.4@-17.2,1.665 ; v1(-13.8,8.5) IC5.Heatsink@-11.75,8.5 ; IC5.Heatsink@-12.389,14.2 IC5.Heatsink@-11.65,14.2 ; R41.1@-10.535,-5.685 Q4.S@-10.535,-7.15 Q4.S@-7.995,-7.15 ; IC1.28@-5.287,-0.073 -5.287,-0.238 v1(-4,-1.525) ; Q3.2@-4.118,22.6 -3.393,21.875 -1.688,21.875 -0.838,22.725 2.475,22.725 R44.1@3.65,23.9 4.425,23.125 5.486,23.125 6.186,22.425 v1(7.525,22.425) ; v1(5.575,12.65) IC2.55@4.1,12.65 2.6,12.65 C4.1@0.9,14.35 0.9,13.15 1.7,12.35 1.7,12.1 3.15,10.65 IC2.59@4.1,10.65 5.575,10.65 v1(5.6,10.625) ; C2.1@7.45,3.4 7.7,3.4 9.25,4.95 9.25,7.2 ; C5.1@8.975,19.575 9.368,19.575 10.25,18.693 IC2.40@10.25,17.8 10.25,16.85 9.95,16.55 9.814,16.55 9.464,16.2 v1(9.464,15.136) ; C17.1@13.7,-6.65 C17.1@13.75,-6.7 ; IC2.25@15.9,12.15 17.35,12.15 17.6,11.9 C1.1@17.6,11.25 ; R11.1@19.1,7.15 19.1,8.5 v1(19.15,8.45) 19.15,9.35 18.775,9.725 18.775,11.193 18.932,11.35 19.85,11.35 v1(20.825,12.325)
  Top Layer w0.25: R24.1@-1.164,4.525 0.082,3.279 IC1.29@0.082,3.027 0.228,3.027 1.954,1.3 3.152,1.3 IC1.12@4.327,2.475 ; IC2.35@12.75,17.8 IC2.34@13.25,17.8 13.25,16.657 13.607,16.3 v1(13.6,16.3) ; v1(14.675,5.025) 14.675,3.35 P2.12@15.275,2.75 ; IC10.2@15.15,-6.7 16,-6.7 16.1,-6.6 NT1.1@16.1,-6.4
  Top Layer w0.3: R27.1@-17.7,2.85 -17.7,2.704 -17.25,2.254 -17.25,2.25 -17.2,2.2 IC7.4@-17.2,1.665 ; 9.25,7.2 9.25,7.417 9.875,8.042 9.875,13.175 10.2,13.5 v1(10.2,14.4) v1(9.464,15.136) ; C1.1@17.9,11.25 17.9,11.7 v1(19.5,13.3)
  Top Layer w0.35: IC5.Heatsink@-8.85,11.4 -8.687,11.4 -7.912,12.175 -6.062,14.025 -3.351,16.735 -3.351,17.212 -4.375,18.235 Q3.2@-4.375,22.6 ; IC1.3@9.727,-6.878 10.105,-6.5 11.399,-6.5 11.3,-6.5 11.12,-6.32 10.843,-6.32 10.953,-6.21 10.953,-6.071
  Top Layer w0.45: P3.PegSlot1@-23.4,-3.575 -21.875,-5.1 v1(-21.875,-5.875) ; -23.4,4.7 -22.95,5.15 -22.95,7.2 -22.025,8.125 -22.025,9.887 -21.549,10.364 -20.196,10.364 -20.032,10.2 C9.1@-19.1,10.2 ; R34.1@-19,4.55 -19,5.075 -18.7,5.375 -15.495,5.375 -15.22,5.1 v1(-14.6,5.1) ; v1(-18.7,-2.6) -17.7,-1.6 -16.7,-0.6 IC7.EP@-16.7,-0.4 ; v1(-13.8,7.7) -12.55,7.7 -11.75,8.5 IC5.Heatsink@-8.85,11.4 ; v1(-12.05,-14.725) -12.05,-14.2 ; R38.1@-10.65,-14.3 v1(-9.625,-14.3) -9.325,-14.3 v1(-8.875,-13.85) ; IC5.Heatsink@-8.8,11.35 v1(-3.75,11.35) ; IC5.Heatsink@-8.075,12.175 -7.912,12.175 v1(-3.75,12.175) ; IC5.Heatsink@-6.225,14.025 -6.062,14.025 v1(-3.4,14.025) ; -3.773,-11.987 -3.157,-11.371 -2.803,-11.371 IC1.20@-2.732,-11.299 -2.282,-10.85 1.725,-10.85 v1(2.025,-11.15) ; v1(-0.25,-0.15) -0.25,0.2 v1(0.1,0.55) v1(0.875,0.55) ; v1(0.525,-0.175) 0.875,0.175 v1(0.875,0.55) ; v1(1,-7.2) 1,-7.35 1.175,-7.525 1.85,-7.525 2.025,-7.7 v1(2.025,-11.15) ; 1.954,1.3 1.204,0.55 v1(0.875,0.55) ; 2.05,-7.975 v1(2.4,-7.975) ; v1(2.475,-11.85) 2.525,-11.8 v1(3.325,-11.8) 3.325,-11.575 v1(2.85,-11.1) 2.8,-11.15 v1(2.025,-11.15) ; v1(3.7,-2.2) v1(3.7,-3) 3.7,-3.6 v1(3.9,-3.8) ; v1@3.863,-3.838 7.5,-7.475 IC1.3@9.13,-7.475 ; IC1.3@9.14,-7.465 IC1.3@9.13,-7.475 ; IC1.3@9.727,-6.878 IC1.3@9.13,-7.475 ; 11.7,-7.8 11.7,-8.183 IC1.1@10.927,-8.956 10.823,-9.06 9.392,-9.06 8.927,-8.596 8.927,-7.677 IC1.3@9.13,-7.475
  Top Layer w0.5: R34.1@-19,4.55 -19,4.316 R27.1@-17.7,3.016 ; -11.35,-4.65 C11.1@-11.35,-3.8
  Top Layer w0.6: C9.1@-18.9,10 -19.1,10.2 -19.1,13.511 -16.486,16.125 -14.314,16.125 -12.389,14.2 -9.589,11.4 IC5.Heatsink@-8.85,11.4 ; R32.1@-14.364,-4.9 -13.675,-5.589 ; v1(-10.85,-4.825) -10.85,-5.2 R41.1@-10.45,-5.6 ; R38.1@-10.7,-14.35 -11.15,-13.9 -12.28,-13.9 -12.58,-13.6 -12.58,-8.525 -13.675,-7.43 -13.675,-5.589 ; Q4.S@-9.265,-7.15 -9.265,-5.235 -9.8,-4.7 -12.786,-4.7 -13.675,-5.589
  Top Layer w0.8: IC5.4@-15.4,11.4 IC5.Heatsink@-9.589,11.4
  Top Layer w1.2: Q4.S@-10.535,-7.15 Q4.S@-9.265,-7.15 Q4.S@-7.995,-7.15 -7.293,-7.15 -7.272,-7.172
  Bottom Layer w0.15: P3.5@-20.55,1.3 -19.8,1.3 -19.45,1.65 R31.1@-18.2,1.65 ; -19.72,-2.32 v1(-19.5,-2.1) ; v1(-18.8,4) -18.2,3.4 R31.1@-18.2,1.65 ; C12.1@-16.8,1.45 -18,1.45 R31.1@-18.2,1.65 ; v1(-13.8,8.5) -13.15,8.5 -13.2,8.45 R15.1@-13.2,8.3 ; -13.3,-5.1 -13.3,-5 ; IC6.7@-5.715,-4.4 -5.515,-4.2 -4.537,-4.2 ; IC6.9@-5.59,-2.8 -4.5,-2.8 ; IC6.13@-5.59,0.4 -6.6,0.4 -7.05,-0.05 C21.1@-7.6,-0.05 -7.25,-0.4 -5.59,-0.4 -5.59,-1.2 -4.55,-1.2 -4.225,-1.525 -4.225,-2.525 -4.5,-2.8 ; IC4.Heatsink@-3.8,-14.95 IC4.Heatsink@-2.85,-14 ; -0.372,-3.5 -0.8,-3.5 -1.5,-4.2 -4.537,-4.2 ; IC4.Heatsink@0.25,-10.9 0,-11.15 IC4.Heatsink@-2.85,-14 ; IC6.48@0.25,-5.74 IC6.48@0.4,-5.59 ; v1(2.025,15.825) 1.675,15.475 0.25,15.475 0.25,14.075 -1.975,11.85 -1.975,11.325 -1.55,10.9 -1,10.9 0.75,12.65 v1(5.575,12.65) 5.6,12.625 v1(5.6,10.625) 5.6,9.936 7.3,8.236 7.3,7.464 5.4,5.564 5.4,4.715 ; IC6.29@3.6,5.59 IC6.30@4.275,5.59 ; R14.1@3.85,-15.4 2.45,-14 IC4.Heatsink@-2.85,-14 ; IC6.30@4.4,5.715 5.4,4.715 ; IC6.31@5.715,4.4 5.4,4.715 ; Q1.2@6.9,21.85 6.95,21.85 v1(7.525,22.425) 7.525,21.507 9.032,20 v1(9.1,20) ; R12.1@19.8,13.85 20.825,12.825 v1(20.825,12.325) ; -4.537,-4.2 -4.29,-3.953 -4.29,-3.01 -4.5,-2.8
  Bottom Layer w0.25: P1.3@11.9,16.1 12.3,16.5 13.407,16.5 13.607,16.3 v1(13.6,16.3)
  Bottom Layer w0.3: v1(10.2,14.4) 10.6,14.4 12,15.8 P1.3@12,16
  Bottom Layer w0.45: -24.2,-2.5 -24.2,-2.775 P3.PegSlot1@-23.4,-3.575 -23.9,-4.075 v1(-23.9,-5) ; -24.2,2.4 -24.2,2.775 P3.PegSlot2@-23.4,3.575 v1(-23.4,5.8) ; v1(-21.325,-5.275) -21.875,-5.825 v1(-21.875,-5.875) -21.441,-5.875 -21.175,-6.141 -21.066,-6.141 v1(-20.75,-5.825) -19.975,-5.05 -19.975,-4.695 -19.45,-4.17 v1(-19.45,-3.075) -19.175,-3.075 v1(-18.7,-2.6) -19.125,-2.175 -19.425,-2.175 v1(-19.5,-2.1) ; v1(-14.6,5.1) -13.85,5.1 C10.1@-13.4,5.55 -13.4,6.4 -13.1,6.7 -13.1,8.2 -13.2,8.3 v1(-13.8,7.7) ; v1(-13.65,13.625) -13.65,13.7 R16.1@-13.1,14.25 ; v1(-12.05,-14.725) -11.8,-14.725 -11.375,-14.3 ; v1(-11.75,-13.925) -11.375,-14.3 ; IC4.Heatsink@-4.9,-13.85 v1(-8.875,-13.85) -9.325,-14.3 v1(-9.625,-14.3) -11.375,-14.3 ; v1(-3.75,11.35) v1(-3.75,12.175) -3.675,12.25 -3.675,13.75 v1(-3.4,14.025) -2.675,14.75 -0.87,14.75 0.005,15.625 R43.1@0.275,15.625 ; v1(-0.25,-0.15) -2.625,-0.15 v1(-4,-1.525) -1.975,-1.525 0.6,-4.1 ; IC4.Heatsink@0,-11.15 v1(2.025,-11.15) 2.45,-11.575 3.325,-11.575 v1(2.85,-11.1) ; R13.1@2.975,-7.975 v1(2.4,-7.975) 2.3,-7.875 1.575,-7.875 v1(1.5,-7.8) 1.5,-7.7 v1(1,-7.2) 0.8,-7.4 C22.1@0.25,-7.4 0.25,-6.9 0.4,-6.75 0.4,-5.59 0.4,-4.3 0.6,-4.1 ; v1(3.325,-11.8) 3.925,-12.4 R5.1@3.925,-13.05 ; v1(3.7,-2.2) v1(3.7,-3) 3.7,-3.6 v1(3.9,-3.8) ; v1@3.863,-3.837 3.6,-4.1 0.6,-4.1 ; 10.953,-6.071 10.953,-6.21 10.843,-6.32 11.12,-6.32 11.3,-6.5 11.399,-6.5 14.225,-6.5 v1(14.425,-6.7)
  Bottom Layer w0.6: R16.1@-13.1,14.25 -12.95,14.4 -10.398,14.4 -10.199,14.599 -10.199,15.955 C15.1@-9.811,16.343 ; IC8.2@-12.569,17.404 -12.038,17.934 -11.72,17.934 -10.412,16.626 C15.1@-10.094,16.626 ; IC4.Heatsink@-3.8,-14.95 0.995,-19.745 0.995,-20.687 1.5,-21.191 C7.1@1.5,-22.1 ; IC3.4@18.8,6.8 18.8,8 19.5,8.7 C8.1@19.9,8.7
  Bottom Layer w0.8: IC4.4@-3.8,-21.5 IC4.Heatsink@-3.8,-14.95 ; IC3.Heatsink@18.8,0.25 IC3.4@18.8,6.8
  Bottom Layer w1: v1(-18.7,-2.6) -15.7,-2.6 v1(-14.5,-3.8) -13.3,-5 ; v1(14.425,-6.7) 14.425,-4.125
  other v1: -2.4,-19.2 -2.4,-18 -2.4,-16.8 -2.4,-15.6 -8.3,-14.7 -12.5,-13.8 0.9,-13.7 -12.8,-12.8 0,-12 0.9,-11.5 -0.9,-11 0.15,-11 -4.9,-10.9 -12.8,-10.4 -12.7,-9.3 -13.4,-8.8 -12.705,-8.4 11.05,-6.625 -13.675,-6.5 -21.3,-6.425 11.9,-5.9 11,-5.85 -13.525,-5.3 -12.911,-4.825 17.2,-4.8 19.2,-3.6 23.4,-3.6 14.4,-2.4 16.8,-2.4 18,-2.4 19.2,-2.4 23.4,-2.4 -2.8,-2.1 -1.8,-2.1 -2.3,-1.2 -1.3,-1.2 16.8,-1.2 18,-1.2 19.2,-1.2 23.4,-1.2 -15.775,-0.35 16.8,0 18,0 19.2,0 23.4,0 -15.85,0.6 16.8,1.2 18,1.2 19.2,1.2 23.4,1.2 16.8,2.4 18,2.4 19.2,2.4 23.4,2.4 -11.1,2.5 -12.15,2.875 -10.4,3.2 -11.475,3.55 19.2,3.6 23.4,3.6 -23.4,6.8 -9.6,7.2 -8.4,7.2 -22.85,7.8 -12,8.4 -10.8,8.4 -9.6,8.4 -8.4,8.4 -7.2,8.4 6.775,8.4 -10.8,9.6 -9.6,9.6 -8.4,9.6 -7.2,9.6 -6,9.6 -5.3,10.8 -21.7,11.1 -21,11.9 -20.8,12.8 2.1,13 -11.8,13.4 -6.275,13.825 -13.7,14.4 -11.8,14.4
IMG_CLK: IC2.44 IC6.47 | length 35.9
  Top Layer w0.15: v1@8.25,15.5 IC2.44@8.25,17.8
  Bottom Layer w0.15: IC6.47@1.2,-5.59 1.2,-6.4 1.84,-7.04 7.26,-7.04 12.6,-1.7 12.6,1.3 12.05,1.85 12.05,3.911 11.2,4.761 11.2,11 8.25,13.95 v1@8.25,15.45
  other v1: 8.2,15.5
IMG_EXPOSURE: IC2.51 IC6.23 | length 23.9
  Top Layer w0.15: v1(-0.4,7.1) 0.05,6.65 4.586,6.65 5.275,7.339 5.275,8.611 5.914,9.25 6.474,9.25 6.874,8.85 7.086,8.85 8.286,7.65 8.686,7.65 8.95,7.914 8.95,9.282 8.7,9.532 8.7,10.336 7.3,11.736 7.3,13.5 6.15,14.65 IC2.51@4.1,14.65
  Bottom Layer w0.15: IC6.23@-1.2,5.59 -1.2,6.3 v1(-0.4,7.1)
LED_SCLK: IC2.49 P2.10 | length 21.6
  Top Layer w0.15: IC2.49@4.1,15.65 6.686,15.65 7.05,15.286 7.05,14.201 7.9,13.351 v1(7.9,12.9) ; v1(11.3,3.6) 11.5,3.4 12.2,3.4 13.85,1.75 P2.10@15.275,1.75
  Bottom Layer w0.15: v1(7.9,12.9) 8.451,12.9 10.6,10.751 10.6,4.3 v1(11.3,3.6)
LED_SIN: IC2.47 P2.8 | length 22.5
  Top Layer w0.15: IC2.47@6.75,17.8 6.75,16.435 7.65,15.535 7.65,14.45 8.8,13.3 v1(8.8,11.4) ; v1(10.3,2.8) 10.4,2.7 11.976,2.7 13.926,0.75 P2.8@15.275,0.75
  Bottom Layer w0.15: v1(8.8,11.4) 9.1,11.4 9.9,10.6 9.9,3.2 v1(10.3,2.8)
LED_XLAT: IC2.48 P2.9 | length 22.4
  Top Layer w0.15: IC2.48@6.25,17.8 6.25,16.511 7.35,15.411 7.35,14.326 8.35,13.326 8.35,12.35 v1(8.1,12.1) ; v1(10.4,3.6) 10.9,3.1 12,3.1 13.85,1.25 P2.9@15.275,1.25
  Bottom Layer w0.15: v1(8.1,12.1) 8.827,12.1 10.2,10.727 10.2,3.8 v1(10.4,3.6)
M\C\L\R\: IC2.9 P1.1 R8.1 | length 10.7
  Top Layer w0.15: IC2.9@10.25,6 10.25,7.1 10.7,7.55 10.7,11.1 11.675,12.075 v1(11.675,12.625)
  Bottom Layer w0.15: R8.1@11.201,11.999 11.675,12.473 v1(11.675,12.625) ; v1@11.7,12.625 12.15,13.075 12.15,13.335 13.401,14.586 P1.1@13.414,14.586
NetBAT1_-: BAT1.2 C14.1 IC9.4 Q5.S R42.1 | length 32.1
  Top Layer w0.15: IC9.4@-8.5,-15.825 -8.475,-15.8 -8.2,-15.8
  Top Layer w0.3: -8.2,-15.8 -8.03,-15.97 -8.03,-18.922 -7.405,-19.547 Q5.S@-7.405,-19.85 Q5.S@-6.135,-19.85 Q5.S@-4.865,-19.85 -4.915,-19.9 -5.45,-20.435 R42.1@-5.45,-21.1
  Top Layer w0.6: -13,-17.925 C14.1@-12.025,-17.925 ; C14.1@-12,-17.95 -11.95,-18 -11,-18 ; -8.3,-19.9 -7.455,-19.9 Q5.S@-7.405,-19.85
  Top Layer w1: -11,-18 -10.375,-18.625 -10.375,-18.862 -9.387,-19.85 -8.35,-19.85 -8.3,-19.9
  Top Layer w1.3: -8.275,-19.85 Q5.S@-7.405,-19.85 ; Q5.S@-7.455,-19.9 Q5.S@-4.915,-19.9
  Top Layer w1.5: BAT1.2@-20.199,-8.643 -17.049,-11.793 -17.049,-16.284 -15.158,-18.175 -13.3,-18.175